# EAGLE board hitter mil (EAGLE 9.6.2)
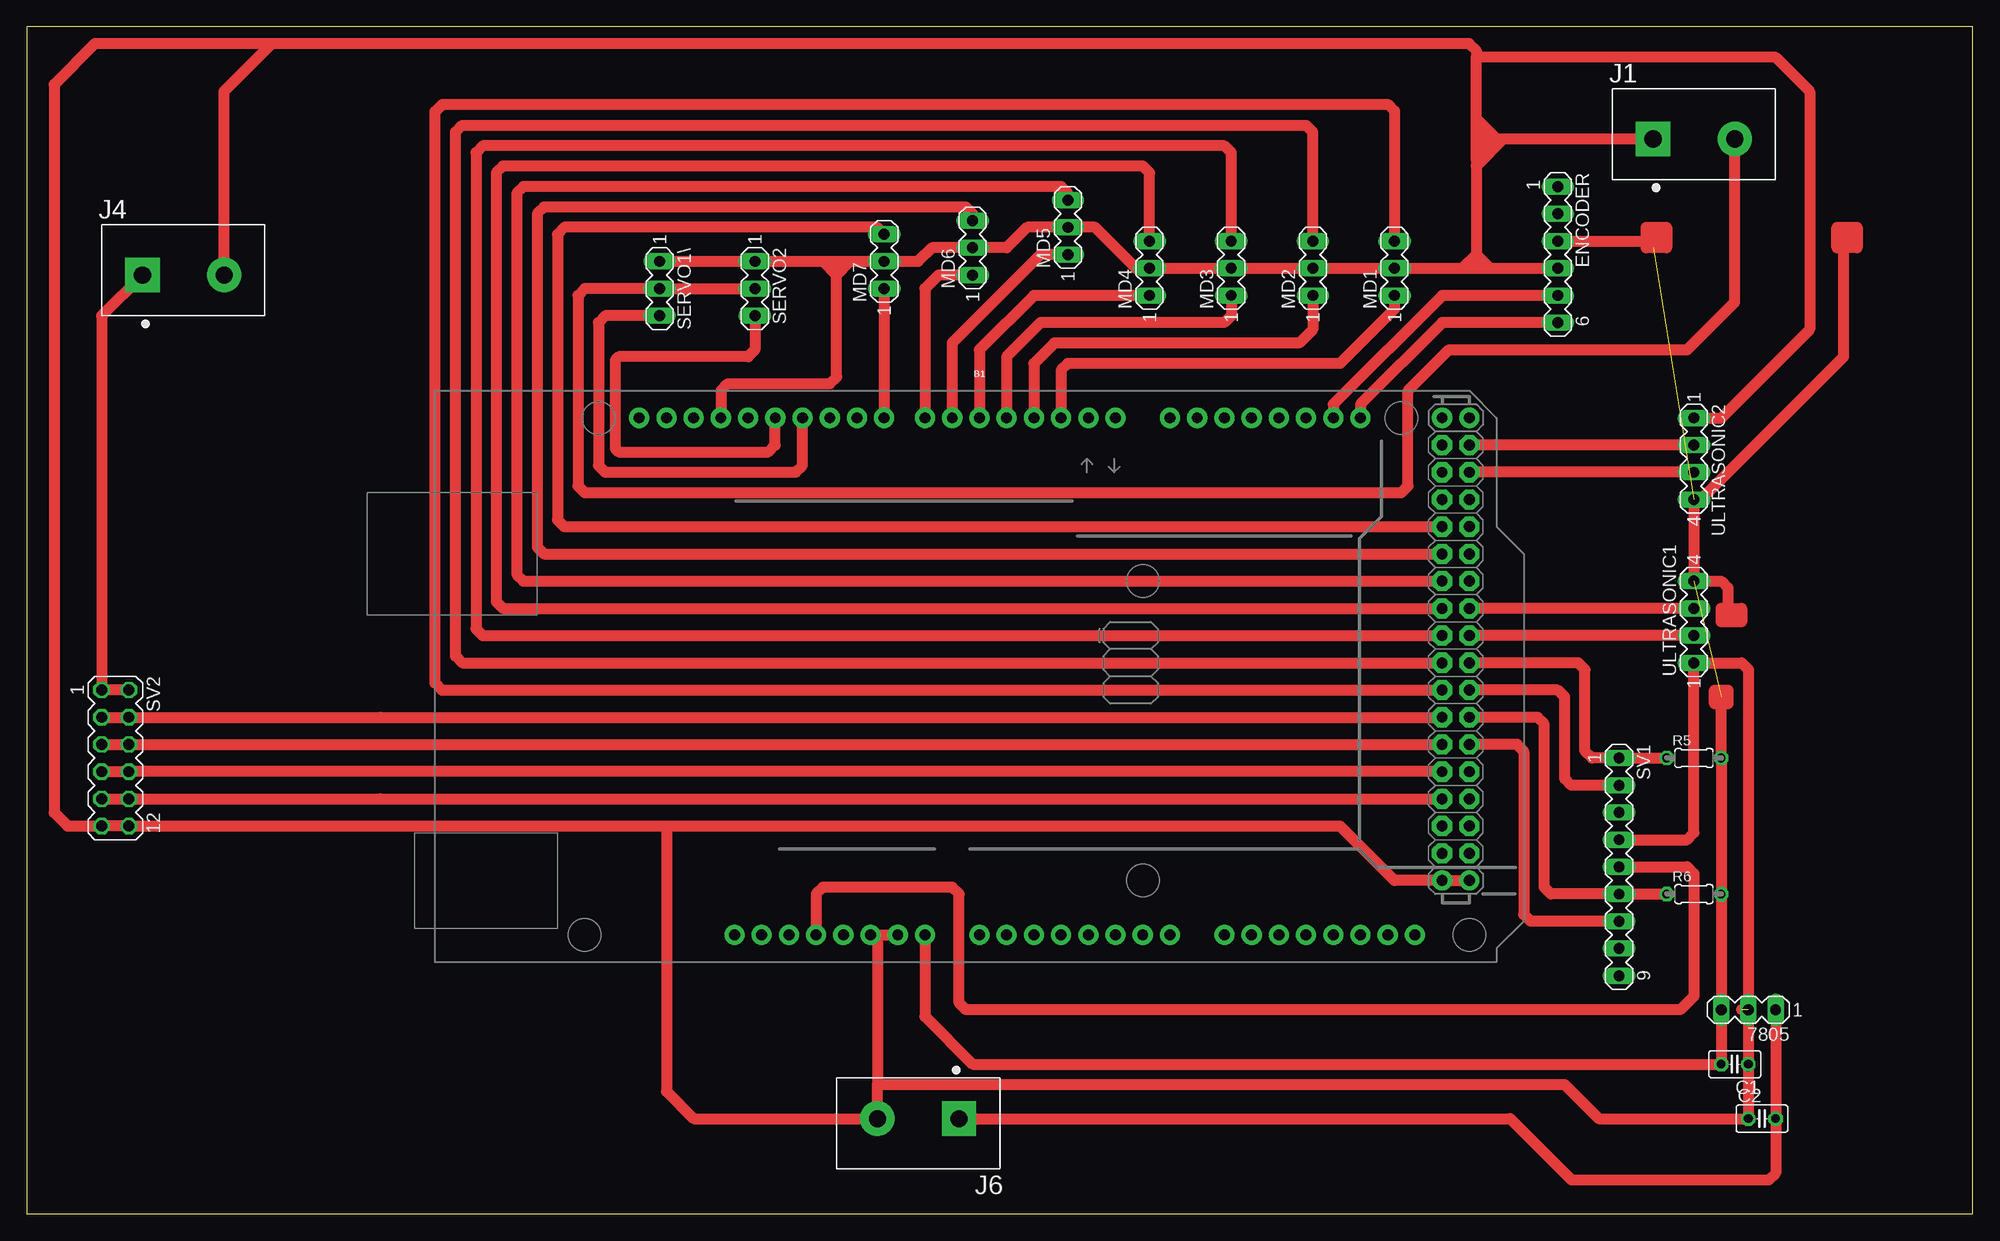
[diagram p0: board, top side]

Size 181.59 x 110.8 mm. Coordinates in mm from the lower left corner, seen from the top.
Outline: 0,0 181.59,0 181.59,110.8 0,110.8 0,0
Copper layers (1*16): Top 0.035mm / dielectric 1.5mm / Bottom 0.035mm
Design rules "default": minimum track width 6mil, minimum drill 0.35mm, track to track 6mil, track to pad 6mil, pad to pad 6mil, via to via 6mil, smd to smd 6mil, copper to edge 40mil, drill to drill 6mil, minimum pad ring 10mil, minimum via ring 8mil, stop-mask expansion 4mil, vias tented up to drill 0mil, thermal gap 10mil

## Footprints (pad centres in the part's own frame; a part is rotated, then mirrored left to right if it is on the bottom)
MA03-1 = drill 1.016 long: 1 -2.54,0; 2 0,0; 3 2.54,0
ARDUINO_MEGA_NO_SILK = drill 1.016 pad 1.88: 0 13.97,24.13; 1 11.43,24.13; 2 8.89,24.13; 3 6.35,24.13; 3.3V -13.97,-24.13; 4 3.81,24.13; 5 1.27,24.13; 5V -11.43,-24.13; 5V@1 44.45,24.13; 5V@2 46.99,24.13; 6 -1.27,24.13; 7 -3.81,24.13; 8 -7.62,24.13; 9 -10.16,24.13; 10 -12.7,24.13; 11 -15.24,24.13; 12 -17.78,24.13; 13 -20.32,24.13; 14 19.05,24.13; 15 21.59,24.13; 16 24.13,24.13; 17 26.67,24.13; 18 29.21,24.13; 19 31.75,24.13; 20 34.29,24.13; 21 36.83,24.13; A0 1.27,-24.13; A1 3.81,-24.13; A2 6.35,-24.13; A3 8.89,-24.13; A4 11.43,-24.13; A5 13.97,-24.13; A6 16.51,-24.13; A7 19.05,-24.13; A8 24.13,-24.13; A9 26.67,-24.13; A10 29.21,-24.13; A11 31.75,-24.13; A12 34.29,-24.13; A13 36.83,-24.13; A14 39.37,-24.13; A15 41.91,-24.13; AREF -25.4,24.13; GND -8.89,-24.13; GND@1 -6.35,-24.13; GND@2 44.45,-19.05; GND@3 46.99,-19.05; GND@4 -22.86,24.13; IOREF -19.05,-24.13; NC -21.59,-24.13; RESET -16.51,-24.13; SCL -30.48,24.13; SDA -27.94,24.13; VIN -3.81,-24.13 | drill 1.016 pad 1.88 octagon: 22 44.45,21.59; 23 46.99,21.59; 24 44.45,19.05; 25 46.99,19.05; 26 44.45,16.51; 27 46.99,16.51; 28 44.45,13.97; 29 46.99,13.97; 30 44.45,11.43; 31 46.99,11.43; 32 44.45,8.89; 33 46.99,8.89; 34 44.45,6.35; 35 46.99,6.35; 36 44.45,3.81; 37 46.99,3.81; 38 44.45,1.27; 39 46.99,1.27; 40 44.45,-1.27; 41 46.99,-1.27; 42 44.45,-3.81; 43 46.99,-3.81; 44 44.45,-6.35; 45 46.99,-6.35; 46 44.45,-8.89; 47 46.99,-8.89; 48 44.45,-11.43; 49 46.99,-11.43; 50 44.45,-13.97; 51 46.99,-13.97; 52 44.45,-16.51; 53 46.99,-16.51
C025-025X050 = drill 0.813 octagon: 1 -1.27,0; 2 1.27,0
MA06-1 = drill 1.016 long: 1 -6.35,0; 2 -3.81,0; 3 -1.27,0; 4 1.27,0; 5 3.81,0; 6 6.35,0
TERMINALBLOCK_PLUGGABLE-2-7.62MM = drill 1.6 pad 3.2 square: 1 -3.81,0 | drill 1.6 pad 3.2: 2 3.81,0
0204/5 = drill 0.813 octagon: 1 -2.54,0; 2 2.54,0
MA09-1 = drill 1.016 long: 1 -10.16,0; 2 -7.62,0; 3 -5.08,0; 4 -2.54,0; 5 0,0; 6 2.54,0; 7 5.08,0; 8 7.62,0; 9 10.16,0
MA06-2 = drill 1.016 octagon: 1 -6.35,-1.27; 2 -6.35,1.27; 3 -3.81,-1.27; 4 -3.81,1.27; 5 -1.27,-1.27; 6 -1.27,1.27; 7 1.27,-1.27; 8 1.27,1.27; 9 3.81,-1.27; 10 3.81,1.27; 11 6.35,-1.27; 12 6.35,1.27
MA04-1 = drill 1.016 long: 1 -3.81,0; 2 -1.27,0; 3 1.27,0; 4 3.81,0

## Placement (x,y rotation side)
7805  [MA03-1]  160.66,19.05 180 top
B1  ARDUINO_MEGA_R3FULL  [ARDUINO_MEGA_NO_SILK]  87.63,50.16 0 top
C1  [C025-025X050]  159.38,13.97 180 top
C2  [C025-025X050]  161.93,8.89 0 top
ENCODER  [MA06-1]  142.88,89.54 270 top
J1  691311400102  [TERMINALBLOCK_PLUGGABLE-2-7.62MM]  155.58,100.33 0 top
J4  691311400102  [TERMINALBLOCK_PLUGGABLE-2-7.62MM]  14.61,87.63 0 top
J6  691311400102  [TERMINALBLOCK_PLUGGABLE-2-7.62MM]  83.19,8.89 180 top
MD1  [MA03-1]  127.63,88.27 90 top
MD2  [MA03-1]  120.02,88.27 90 top
MD3  [MA03-1]  112.4,88.27 90 top
MD4  [MA03-1]  104.78,88.27 90 top
MD5  [MA03-1]  97.16,92.08 90 top
MD6  [MA03-1]  88.27,90.17 90 top
MD7  [MA03-1]  80.01,88.9 90 top
R5  [0204/5]  155.58,42.54 0 top
R6  [0204/5]  155.58,29.85 0 top
SERVO1\  [MA03-1]  59.06,86.36 270 top
SERVO2  [MA03-1]  67.95,86.36 270 top
SV1  [MA09-1]  148.59,32.38 270 top
SV2  [MA06-2]  8.25,42.54 270 top
ULTRASONIC1  [MA04-1]  155.58,55.24 90 top
ULTRASONIC2  [MA04-1]  155.58,70.48 270 top

## Library data of the parts
7805 ENCODER MD1-MD7 SERVO1\ SERVO2 SV1 SV2 ULTRASONIC1 ULTRASONIC2 = con-lstb; OC_FARNELL: unknown; OC_NEWARK: unknown
B1 = SparkFun-Boards
C1 C2 R5 R6 = resistor
J1 J4 J6 = Terminal Blocks FOR USE IN PB; CREATED_BY: PCBLayout.com; DIGIKEY_PART_NO: 732-2823-ND; MANUFACTURER: WURTH ELEKTRONIK; MPN: 691311400102

## Nets
2: B1.2 MD1.1
3: B1.3 MD2.1
3.3: B1.3.3V SV1.5
4: B1.4 MD3.1
5: B1.5 MD4.1
6: B1.6 MD5.1
7: B1.7 MD6.1
8: B1.8 MD7.1
9: B1.9
10: B1.10
11: B1.11 SERVO1\.3
12: B1.12 SERVO2.3
20: B1.20 ENCODER.5
21: B1.21 ENCODER.6
22: B1.22
23: B1.23 ULTRASONIC2.2
24: B1.24
25: B1.25 ULTRASONIC2.3
26: B1.26
28: B1.28 MD7.3
30: B1.30 MD6.3
32: B1.32 MD5.3
34: B1.34 MD4.3
35: B1.35 ULTRASONIC1.3
36: B1.36 MD3.3
37: B1.37 ULTRASONIC1.2
38: B1.38 MD2.3
39: B1.39 R5.1 SV1.1
40: B1.40 MD1.3
41: B1.41 SV1.2
42: B1.42 SV2.3 SV2.4
43: B1.43 R6.1 SV1.6
44: B1.44 SV2.5 SV2.6
45: B1.45 SV1.7
46: B1.46 SV2.7 SV2.8
47: B1.47
48: B1.48 SV2.9 SV2.10
49: B1.49
GND: 7805.2 B1.GND B1.GND@1 B1.GND@2 B1.GND@3 B1.GND@4 C1.1 C2.1 ENCODER.4 J1.1 J4.2 J6.2 MD1.2 MD2.2 MD3.2 MD4.2 MD5.2 MD6.2 MD7.2 SERVO1\.1 SERVO2.1 SV1.4 SV2.11 SV2.12 ULTRASONIC1.1 ULTRASONIC2.1
LOAD: J4.1 SV2.1 SV2.2
VC: J1.2 SERVO1\.2 SERVO2.2
VCC: 7805.1 C2.2 J6.1
VOUT: 7805.3 B1.VIN C1.2 ENCODER.3 R5.2 R6.2 ULTRASONIC1.4 ULTRASONIC2.4

## Tracks (layer width: path | path; a pad name or v marks a point on that pad's centre or on a via)
2
  Top 1.016: B1.2 96.52,78.74 97.16,79.38 122.56,79.38 127.63,84.45 MD1.1
3
  Top 1.016: MD2.1 120.02,82.55 118.75,81.28 95.89,81.28 93.98,79.38 B1.3
3.3
  Top 1.016: SV1.5 154.94,32.38 155.58,31.75 155.58,20.32 154.31,19.05 87.63,19.05 87,19.69 87,29.85 86.36,30.48 74.3,30.48 73.66,29.85 B1.3.3V
4
  Top 1.016: MD3.1 112.4,83.82 111.76,83.19 94.62,83.19 91.44,80.01 B1.4
5
  Top 1.016: MD4.1 93.98,85.73 88.9,80.65 B1.5
6
  Top 1.016: MD5.1 94.62,89.54 86.36,81.28 B1.6
7
  Top 1.016: MD6.1 85.09,87.63 83.82,86.36 B1.7
8
  Top 1.016: MD7.1 B1.8
11
  Top 1.016: SERVO1\.3 53.98,83.82 53.34,83.19 53.34,69.85 53.98,69.22 71.76,69.22 72.39,69.85 B1.11
12
  Top 1.016: SERVO2.3 67.95,80.65 67.31,80.01 55.25,80.01 54.92,79.68 54.92,71.45 55.25,71.12 69.22,71.12 69.85,71.76 B1.12
20
  Top 1.016: ENCODER.5 132.08,85.73 121.92,75.57 B1.20
21
  Top 1.016: ENCODER.6 132.08,83.19 124.46,75.57 B1.21
23
  Top 1.016: ULTRASONIC2.2 B1.23
25
  Top 1.016: ULTRASONIC2.3 B1.25
28
  Top 1.016: MD7.3 79.38,92.08 50.17,92.08 49.53,91.44 49.53,64.77 50.17,64.14 130.18,64.14 130.81,64.14 B1.28
30
  Top 1.016: MD6.3 88.27,93.34 87.63,93.98 48.26,93.98 47.62,93.34 47.62,62.23 48.26,61.59 B1.30
32
  Top 1.016: MD5.3 97.16,95.25 96.52,95.89 46.36,95.89 45.72,95.25 45.72,59.69 46.36,59.05 B1.32
34
  Top 1.016: MD4.3 104.78,97.16 104.14,97.79 44.45,97.79 43.81,97.16 43.81,57.15 44.45,56.52 B1.34
35
  Top 1.016: ULTRASONIC1.3 B1.35
36
  Top 1.016: MD3.3 112.4,99.06 111.76,99.7 42.55,99.7 41.91,99.06 41.91,54.61 42.55,53.98 B1.36
37
  Top 1.016: ULTRASONIC1.2 B1.37
38
  Top 1.016: MD2.3 120.02,100.97 119.38,101.6 40.64,101.6 40,100.97 40,52.07 40.64,51.43 B1.38
39
  Top 1.016: B1.39 144.78,51.43 145.41,50.8 145.41,43.18 146.05,42.54 SV1.1 R5.1
40
  Top 1.016: MD1.3 127.63,102.92 127,103.56 38.79,103.56 38.1,102.87 38.1,49.53 38.73,48.89 B1.40
41
  Top 1.016: SV1.2 144.15,40 143.51,40.64 143.51,48.26 142.88,48.89 B1.41
42
  Top 1.016: B1.42 33.02,46.35 SV2.4 SV2.3
43
  Top 1.016: B1.43 140.97,46.35 141.6,45.72 141.6,30.48 142.24,29.85 SV1.6 R6.1
44
  Top 1.016: B1.44 SV2.6 SV2.5
45
  Top 1.016: SV1.7 140.34,27.31 139.7,27.94 139.7,43.18 139.06,43.81 B1.45
46
  Top 1.016: B1.46 SV2.8 | SV2.8 8.89,41.27 | SV2.7 SV2.8
48
  Top 1.016: B1.48 33.02,38.73 10.16,38.73 SV2.10 SV2.9
GND  (1 unrouted)
  Top 1.016: B1.GND@4 64.77,76.84 65.41,77.47 74.93,77.47 75.56,78.11 75.56,88.9 | 133.99,88.27 MD1.2 MD2.2 MD3.2 MD4.2 103.51,88.27 99.7,92.08 MD5.2 93.34,92.08 91.44,90.17 MD6.2 84.45,90.17 83.19,88.9 MD7.2 76.84,88.9 | 133.99,88.27 135.25,88.27 | 135.25,88.27 136.53,88.27 | 136.53,88.27 ENCODER.4 | SERVO1\.1 SERVO2.1 74.3,88.9 | 74.3,88.9 75.56,88.9 | 75.56,88.9 76.84,88.9 | 76.84,88.9 75.56,87.63 74.3,88.9 | 135.25,88.27 135.25,89.54 | 135.25,89.54 133.99,88.27 | 135.25,89.54 136.53,88.27 | ULTRASONIC2.1 158.12,74.3 166.37,82.55 166.37,104.78 163.19,107.95 135.25,107.95 | 22.86,109.22 134.62,109.22 135.25,108.59 135.25,107.95 | 135.25,98.43 135.25,97.79 | 135.25,97.79 135.25,89.54 | 135.89,99.7 136.53,99.7 | 135.89,99.7 135.25,99.7 135.25,100.97 136.53,99.7 | SV1.4 154.94,34.92 155.58,35.56 ULTRASONIC1.1 160.02,51.43 160.66,50.8 160.66,19.69 160.02,19.05 | B1.GND@1 B1.GND 79.38,25.4 79.38,12.06 | B1.GND@3 B1.GND@2 127.63,31.12 122.56,36.2 59.69,36.2 | 7805.2 C1.1 C2.1 146.69,8.89 143.51,12.06 79.38,12.06 | 79.38,8.26 J6.2 | J6.2 79.38,12.06 | J4.2 18.41,104.78 22.86,109.22 | 22.86,109.22 6.35,109.22 2.54,105.41 2.54,37.46 3.81,36.2 SV2.11 SV2.12 59.69,36.2 | 59.69,36.2 59.69,11.43 62.23,8.89 J6.2 | 135.25,98.43 135.25,101.6 | 135.25,101.6 135.25,102.23 | 135.25,102.23 135.25,107.95 | 135.89,99.7 136.53,100.33 | 136.53,100.33 137.16,100.33 | 137.16,100.33 137.8,100.33 | 137.8,100.33 J1.1 | 135.25,101.6 136.53,100.33 | 136.53,99.7 135.25,98.43 | 137.8,100.33 135.25,97.79 | 135.25,102.23 137.16,100.33
LOAD
  Top 1.016: J4.1 6.98,83.82 SV2.1 SV2.2
VC
  Top 1.016: SERVO2.2 SERVO1\.2 52.07,86.36 51.44,85.73 51.44,67.95 52.07,67.31 128.27,67.31 128.91,67.95 128.91,76.84 132.72,80.65 148.59,80.65 150.5,80.65 154.94,80.65 159.38,85.09 J1.2
VCC
  Top 1.016: 7805.1 C2.2 163.19,3.81 162.56,3.17 144.15,3.17 138.43,8.89 J6.1
VOUT  (2 unrouted)
  Top 1.016: B1.VIN 83.82,18.42 88.27,13.97 C1.2 7805.3 R6.2 R5.2 158.12,47.62 | 158.75,56.52 158.75,58.42 158.12,59.05 ULTRASONIC1.4 ULTRASONIC2.4 156.21,66.68 169.55,80.01 169.55,90.17 | ENCODER.3 151.13,90.81 | 151.77,90.17 151.13,90.81 | 151.13,90.81 151.13,92.08 | 151.13,92.08 152.4,92.08 | 152.4,92.08 153.03,92.08 153.03,90.17 151.13,90.17 151.13,90.81 | 152.4,92.08 152.4,90.81 151.13,92.08 | 169.55,90.17 168.91,90.17 168.91,92.08 169.55,92.08 | 169.55,92.08 170.81,92.08 170.81,90.17 169.55,90.17 | 169.55,92.08 170.18,91.44 170.18,90.81 169.55,90.81 169.55,92.08 | 158.75,55.24 160.02,55.24 160.02,56.52 158.75,56.52 | 158.12,55.24 158.12,56.52 158.75,56.52 | 158.12,55.24 158.75,55.88 159.38,55.88 158.75,55.24 | 158.75,55.24 158.12,55.24 | 158.12,47.62 157.48,47.62 157.48,48.89 158.75,48.89 158.75,47.62 158.12,47.62 | 158.12,48.26 158.12,47.62